# Altium PCB Daughter_Board_PCB_Layout.PcbDoc
Units mil, origin at the board's own origin, x right, y up, seen from the top; angles counter-clockwise.
Board outline 1665.35 x 1665.35 mil, 2 copper layers (Top Layer, Bottom Layer); 31 components, 37 nets, 148 pads, 38 vias.
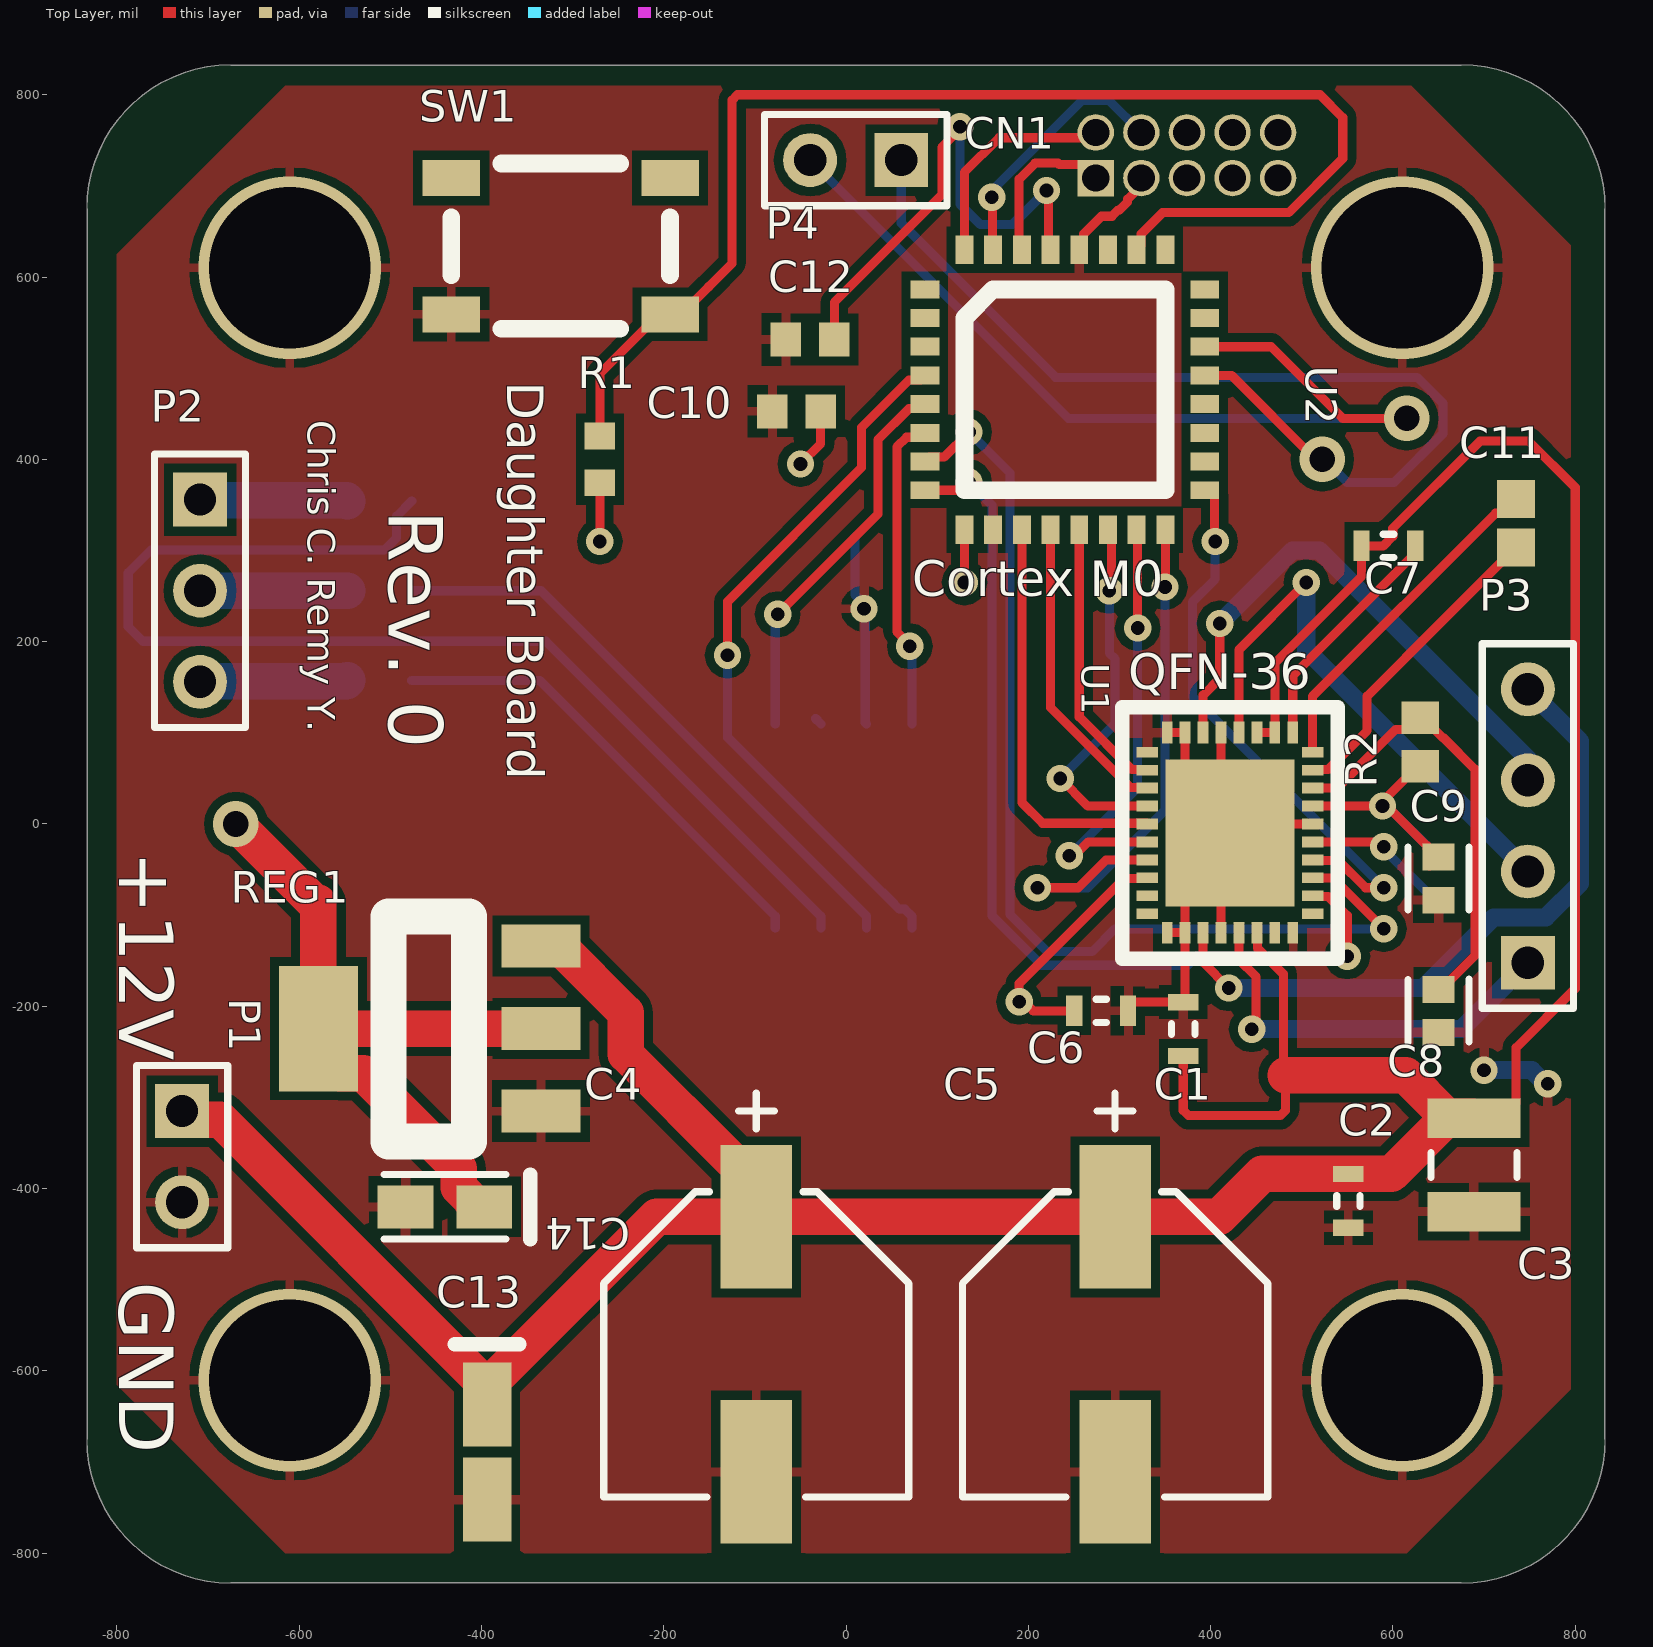
[diagram p0: Top Layer view]
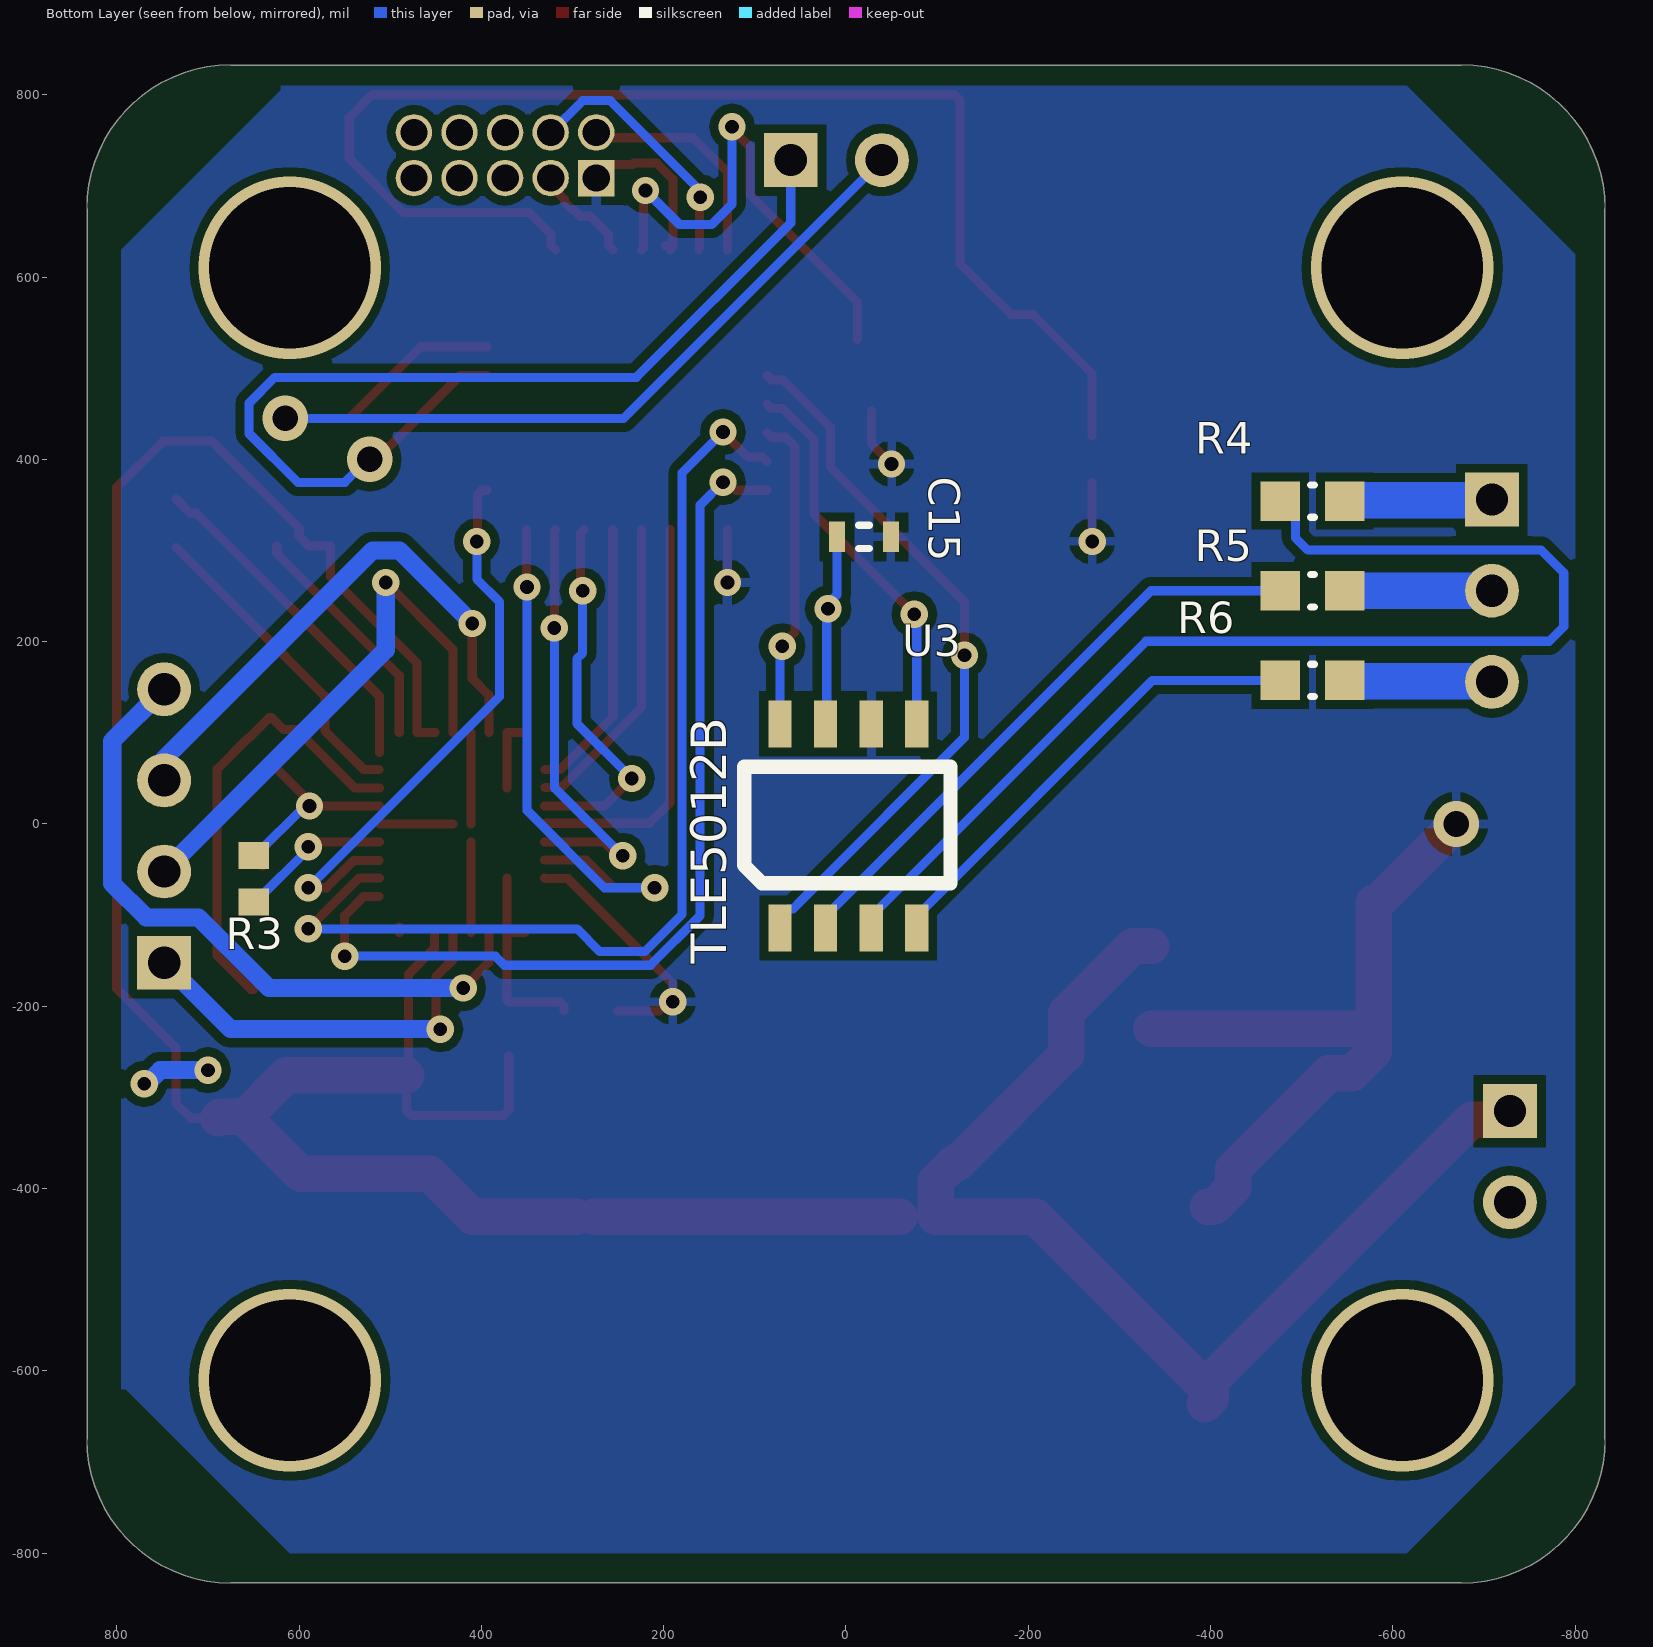
[diagram p1: Bottom Layer view, seen from below]

## Layer stack, top to bottom
Top Solder: solder mask 0.4, Solder Resist, Dk 3.5
Top Layer: signal copper 1.4
Dielectric 1: dielectric 12.6, FR-4, Dk 4.8
Bottom Layer: signal copper 1.4
Bottom Solder: solder mask 0.4, Solder Resist, Dk 3.5

## Board outline
-832.68,-675.2 -832.68,675.2 cw(c-675.2,675.2) -675.2,832.68 675.2,832.68 cw(c675.2,675.2) 832.68,675.2 832.68,-675.2 cw(c675.2,-675.2) 675.2,-832.68 -675.2,-832.68 cw(c-675.2,-675.2)

## Design rules (kind name [scope] priority, off if disabled: settings)
Clearance [All] p1: gap=10 ignorepadtopadclearanceinfootprint=FALSE except(0: Arc-Hole Track-Hole SMDPad-Hole THPad-Hole Via-Hole Fill-Hole Poly-Hole Region-Hole Text-Hole; 4.9: SMDPad-SMDPad; 5: Arc-Arc Arc-Track Track-Track; 8: Arc-SMDPad Track-SMDPad)
PolygonConnect [All] p1: connectstyle=Relief reliefconductorwidth=10 reliefentries=4 polygonreliefangle="90 Angle" airgapwidth=10
RoutingVias [All] p1: holewidth=28 width=50 viastyle="Through Hole" minholewidth=28 minwidth=50 maxholewidth=28 maxwidth=50
SilkToSilkClearance [All] p1: silktosilkclearance=0
SolderMaskExpansion [All] p1: expansion=4 istentingtop=FALSE
Width [All] p1: maxlimit=40 minlimit=10 preferedwidth=20 minimp=50.000000 maximp=50.000000 favimp=50.000000
29 further rules are at their usual default settings.

## Components (designator, comment, footprint, x,y, rotation, side; value= is the part's Value field where it differs from the comment)
C1 "CGA3E2X7R1H104K080AA" CAPC1608X90X20LL10 370,-225 r270 top
C2 "CGA3E2X7R1H104K080AA" CAPC1608X90X20LL10 551.18,-413.39 r90 top
C3 "C1210C476M4PACTU" CAPC3225X270X50LL20T25 688.98,-374.02 r90 top
C4 "EEE-FK1H101P" FP-EEE-FK1H101P-MFG -98.43,-570.87 r90 top value=100uF
C5 "EEE-FK1H101P" FP-EEE-FK1H101P-MFG 295.28,-570.87 r90 top value=100uF
C6 "CGA3E2X7R1H104K080AA" CAPC1608X90X20LL10 280,-205 r180 top
C7 "CGA3E2X7R1H104K080AA" CAPC1608X90X20LL10 595,305 r0 top
C8 "C0603C474K4RACTU" FP-C0603C-CF-MFG 650,-205 r90 top value="0.47 μF"
C9 "C0603C475K9PACTU" FP-C0603-CG-MFG 650,-60 r270 top value=4.7uF
C10 "GRM188R60J106ME47D" CAPC1608X90X35NL10T15 -54.37,452.76 r0 top
C11 "CC0603KRX7R9BB223" CAPC1608X90X40ML10T20 735,330 r270 top
C12 "GRM188R60J106ME47D" CAPC1608X90X35NL10T15 -39.37,531.5 r0 top
C13 "T491A106K010AT" KEMT-A-3216-18-2_M -393.7,-688.98 r270 top
C14 "TAJA226K010RNJ" AVX-TAJ-A-2_L -440,-420 r180 top
C15 "CGA3E2X7R1H104K080AA" CAPC1608X90X20LL10 -19.69,314.96 r180 bottom
CN1 "JTAG Connector" "Header 5x2 - 50mil" 274.02,708.66 r90 top
P1 "Header 2" HDR1X2 -728.35,-314.96 r270 top
P2 "Header 3" HDR1X3 -708.66,355.91 r270 top
P3 "Header 4" HDR1X4 748.03,-152.17 r90 top
P4 "Header 2" HDR1X2 60.63,728.35 r180 top
R1 "ERJ3EKF1002V" RESC1609X55X30LL15T15 -270,400 r90 top
R2 "CRCW06033R30JNEA" RESC1609X50X30ML10T20 630,90 r90 top
R3 "ERJ3EKF1002V" RESC1609X55X30LL15T15 650,-60 r90 bottom
R4 "470R 1% 0603(1608)" RESC0603(1608)_M -511.81,354.33 r180 bottom value="470.00 Ohm"
R5 "470R 1% 0603(1608)" RESC0603(1608)_M -511.81,255.91 r180 bottom value="470.00 Ohm"
R6 "470R 1% 0603(1608)" RESC0603(1608)_M -511.81,157.48 r180 bottom value="470.00 Ohm"
REG1 "Voltage Reg" SOT223 -334.65,-314.96 r90 top
SW1 "PTS525SM15SMTR2 LFS" "PTS525 SM08 SMTR2 LFS" -192.91,559.06 r180 top
U1 "TMC2130-LA" QFN-36 421.26,-9.84 r0 top
U2 "ATSAMD21E15B-AUT" TQFP-32 86.61,586.61 r0 top
U3 "TLE5012B" PG-DSO-8 72.44,-114.17 r180 bottom

## Footprints (in the part's own frame and the unit in brackets; to place one, negate y for a bottom-side part, rotate by r counter-clockwise, add the part's x,y. Pads: shape width x height; smd on the part's side, far side on the other; paste and mask are expansions set on the pad)
AVX-TAJ-A-2_L [mm] "Molded Capacitor, 2-Leads, Body 3.4x1.8mm, IPC High Density"
  rect 1.55x1.2 smd: 1(-1.1,0) 2(1.1,0)
  silkscreen extent -2.37,-0.9 1.7,0.9, body extent -1.92,-0.9 1.92,0.9, height 1.8
CAPC1608X90X20LL10 [mm] "Chip Capacitor, 2-Leads, Body 1.70x0.90mm, IPC High Density"
  rect 0.45x0.85 smd: 1(-0.75,0) 2(0.75,0)
  silkscreen extent -0.15,-0.33 0.15,0.33, body extent -0.85,-0.45 0.85,0.45, height 0.9
CAPC1608X90X35NL10T15 [mm] "Chip Capacitor, 2-Leads, Body 1.60x0.80mm, IPC Medium Density"
  rect 0.85x0.95 smd: 1(-0.675,0) 2(0.675,0)
  body extent -0.85,-0.45 0.85,0.45, height 0.9
CAPC1608X90X40ML10T20 [mm] "Chip Capacitor, 2-Leads, Body 1.7x0.9mm, IPC Low Density"
  rect 1.05x1.05 smd: 1(-0.675,0) 2(0.675,0)
  body extent -0.85,-0.45 0.85,0.45, height 0.9
CAPC3225X270X50LL20T25 [mm] "Chip Capacitor, 2-Leads, Body 3.20x2.50mm, IPC High Density"
  rect 1.1x2.6 smd: 1(-1.3,0) 2(1.3,0)
  silkscreen extent -0.35,-1.2 0.35,1.2, body extent -1.7,-1.35 1.7,1.35, height 2.7
FP-C0603-CG-MFG [mm]
  rect 0.75x0.9 smd paste+0 mask+0: 1(-0.6,0) 2(0.6,0)
  silkscreen extent -0.87,-0.85 0.87,0.85, body extent -1.2,-0.6 1.2,0.6, height 0.25
FP-C0603C-CF-MFG [mm]
  rect 0.75x0.9 smd paste+0 mask+0: 1(-0.6,0) 2(0.6,0)
  silkscreen extent -0.87,-0.85 0.88,0.85, body extent -1.2,-0.6 1.2,0.6, height 0.25
FP-EEE-FK1H101P-MFG [mm]
  rect 4x2 smd paste+0 mask+0: 1(-3.55,0) 2(3.55,0)
  silkscreen extent -4.25,-4.25 7,4.25, body extent -5.8,-4.5 5.8,4.5, height 0.25
HDR1X2 [mm] "Connector; Header; 2 Position"
  rect 1.5x1.5 hole 0.9: 1(0,0)
  round 1.5 hole 0.9: 2(2.54,0)
  silkscreen extent -1.27,-1.27 3.81,1.27
HDR1X3 [mm] "Connector; Header; 3 Position"
  rect 1.5x1.5 hole 0.9: 1(0,0)
  round 1.5 hole 0.9: 2(2.54,0) 3(5.08,0)
  silkscreen extent -1.27,-1.27 6.35,1.27
HDR1X4 [mm] "Connector; Header; 4 Position"
  rect 1.5x1.5 hole 0.9: 1(0,0)
  round 1.5 hole 0.9: 2(2.54,0) 3(5.08,0) 4(7.62,0)
  silkscreen extent -1.27,-1.27 8.89,1.27
"Header 5x2 - 50mil" [mil]
  rect 40x40 hole 30: 1(0,0)
  round 40 hole 30: 2(50,0) 3(0,-50) 4(50,-50) 5(0,-100) 6(50,-100) 7(0,-150) 8(50,-150) 9(0,-200) 10(50,-200)
KEMT-A-3216-18-2_M [mm] "Molded TAN Capacitor, 2-Leads, Body 3.4x1.8mm, IPC Low Density"
  rect 2.35x1.35 smd: 1(-1.325,0) 2(1.325,0)
  silkscreen extent -3,-0.9 -3,0.9, body extent -1.7,-0.9 1.7,0.9, height 1.8
PG-DSO-8 [mm]
  rect 0.65x1.31 smd: 1(0,0) 2(1.27,0) 3(2.54,0) 4(3.81,0) 5(3.81,5.69) 6(2.54,5.69) 7(1.27,5.69) 8(0,5.69)
  silkscreen extent -1,1.25 4.75,4.5
"PTS525 SM08 SMTR2 LFS" [mm]
  rect 1.6x1 smd: 1(0,0) 2(6.1,0) 3(0,-3.8) 4(6.1,-3.8)
  silkscreen extent 0,-4.2 6.1,0.4
QFN-36 [mm]
  rect 0.6x0.3 smd mask+0: 1(-2.3,2.25) 2(-2.3,1.75) 3(-2.3,1.25) 4(-2.3,0.75) 5(-2.3,0.25) 6(-2.3,-0.25) 7(-2.3,-0.75) 8(-2.3,-1.25) 9(-2.3,-1.75) 10(-2.3,-2.25) 19(2.3,-2.25) 20(2.3,-1.75) 21(2.3,-1.25) 22(2.3,-0.75) 23(2.3,-0.25) 24(2.3,0.25) 25(2.3,0.75) 26(2.3,1.25) 27(2.3,1.75) 28(2.3,2.25)
  rect 0.3x0.6 smd mask+0: 11(-1.75,-2.775) 12(-1.25,-2.775) 13(-0.75,-2.775) 14(-0.25,-2.775) 15(0.25,-2.775) 16(0.75,-2.775) 17(1.25,-2.775) 18(1.75,-2.775) 29(1.75,2.8) 30(1.25,2.8) 31(0.75,2.8) 32(0.25,2.8) 33(-0.25,2.8) 34(-0.75,2.8) 35(-1.25,2.8) 36(-1.75,2.8)
  rect 3.6x4.1 smd mask+0: -(0,0)
  silkscreen extent -3,-3.5 3,3.5
RESC0603(1608)_M [mm] "Chip Resistor, Body 1.6x0.8mm, IPC Low Density"
  rect 1.1x1.1 smd: 1(-0.9,0) 2(0.9,0)
  silkscreen extent -0.05,-0.45 0.05,0.45, body extent -0.85,-0.47 0.85,0.47, height 0.6
RESC1609X50X30ML10T20 [mm] "Chip Resistor, 2-Leads, Body 1.55x0.85mm, IPC Low Density"
  rect 0.9x1.05 smd: 1(-0.675,0) 2(0.675,0)
  body extent -0.82,-0.48 0.82,0.48, height 0.5
RESC1609X55X30LL15T15 [mm] "Chip Resistor, 2-Leads, Body 1.75x0.95mm, IPC High Density"
  rect 0.75x0.85 smd: 1(-0.65,0) 2(0.65,0)
  body extent -0.87,-0.48 0.87,0.48, height 0.55
SOT223 [mm]
  rect 1.2x2.2 smd: 1(0,0) 2(2.3,0) 3(4.6,0)
  rect 3.5x2.2 smd: 4(2.3,6.2)
  silkscreen extent -0.85,2 5.42,4.25
TQFP-32 [mm]
  rect 0.8x0.5 smd mask+0: 1(0,0) 2(0,-0.8) 3(0,-1.6) 4(0,-2.4) 5(0,-3.2) 6(0,-4) 7(0,-4.8) 8(0,-5.6) 17(7.8,-5.6) 18(7.8,-4.8) 19(7.8,-4) 20(7.8,-3.2) 21(7.8,-2.4) 22(7.8,-1.6) 23(7.8,-0.8) 24(7.8,0)
  rect 0.5x0.8 smd mask+0: 9(1.1,-6.7) 10(1.9,-6.7) 11(2.7,-6.7) 12(3.5,-6.7) 13(4.3,-6.7) 14(5.1,-6.7) 15(5.9,-6.7) 16(6.7,-6.7) 25(6.7,1.1) 26(5.9,1.1) 27(5.1,1.1) 28(4.3,1.1) 29(3.5,1.1) 30(2.7,1.1) 31(1.9,1.1) 32(1.1,1.1)
  silkscreen extent 1.1,-5.6 6.7,0

## Part data
C1 C2 C6 C7 C15: library part CMP-2000-07546-1, "Chip Capacitor, 0.1 uF, +/- 10%, 50 V, -55 to 125 degC, 0603 (1608 Metric), RoHS, Tape and Reel", Capacitance=100nF, Case Code (Imperial)=0603, Case Code (Metric)=1608, Dielectric=X7R, Manufacturer=TDK, Max Operating Temperature=125degC, Min Operating Temperature=-55degC, Package Description="2-Pin Surface Mount Device, Body 1.6 x 0.8 mm", Package Quantity=1, Package Reference=603, Tolerance=10%, Voltage=50V, Case/Package=0603, Composition=Ceramic, Datasheet URL=https://product.tdk.com/info/en/catalog/datasheets/mlcc_automotive_general_en.pdf, Datasheet Version=12/2014, Depth=0.8mm, Height=0.8mm, Lead Free=LeadFree, Length=1.6mm, Manufacturer URL=http://www.tdk.com/, Mount=SurfaceMount, Mounting Technology=SurfaceMount, Packaging=TapeandReel, Radiation Hardening=No, REACH SVHC=NoSVHC, RoHSCompliant=True, Termination=SMD/SMT, Thickness=0.035inch, Voltage Rating=50V, Voltage Rating (DC)=50V, Weight=7.1E-05oz, Width=0.8mm
C3: library part CMP-2000-06020-1, "Chip Capacitor, 47 uF, +/- 20%, 16 V, -55 to 85 degC, 1210 (3225 Metric), RoHS, Tape and Reel", Capacitance=47µF, Manufacturer=Kemet, Operating Temperature=-55°C~85°C, Package / Case=1210(3225Metric), Package Description="2-Pin Surface Mount Device, Body 3.2 x 2.5 mm", Package Reference=1210, Ratings=-, Standard Package=1, Temperature Coefficient=X5R, Tolerance=±20%, Voltage - Rated=16V, Applications=GeneralPurpose, Catalog Drawings=ACTU_1210, Category=Capacitors, Datasheet URL=http://www.datasheets360.com/pdf/-8690541728068054270, Datasheet Version=05/2013, Family=CeramicCapacitors, Features=-, Height - Seated (Max)=-, Lead Spacing=-, Lead Style=-, Manufacturer URL=http://www.kemet.com/, Mounting Technology=SurfaceMount, Mounting Type=SurfaceMount,MLCC, Online Catalog=X5RDielectric(CommercialGrade), Other Names=399-5514-6, Packaging=Digi-Reel®, Product Training Modules=CapacitorBasics-TypicalUsesforCapacitors, Series=C, Size / Dimension="0.126\"Lx0.098\"W(3.20mmx2.50mm)", Thickness (Max)="0.110\"(2.80mm)"
C4 C5: library part CMP-05427-000005-1, "CAP ALUM 100UF 20% 50V SMD", Capacitance=100uF, Leakage Current=50uA, Manufacturer="Panasonic Electronic Components", Package=0, Ripple Current=350mA, Temperature="-55°C to +105°C", Temperature Range High=+105°C, Temperature Range Low=-55°C, Tolerance=20%, Voltage Rating=50V, Automotive=Yes, Automotive Grade="Grade 2", Category=Cap, ComponentLink2Description=Datasheet, ComponentLink2URL=https://industrial.panasonic.com/cdbs/www-data/pdf/RDE0000/ABA0000C1181.pdf, Device Class L1="Passive Components", Device Class L2=Capacitors, Device Class L3="Aluminum Electrolytic Capacitors", Digikey Description="CAP ALUM 100UF 20% 50V SMD", Dissipation Factor=10%, Esr=0.34Ω, Height=10.5mm, Lead Free=Yes, Life=2000Hours, Manufacturer Part Number=EEE-FK1H101P, Material=Aluminum, Mouser Description="Cap Aluminum Lytic 100uF 50V 20% (8 X 10.2mm) SMD 350mA 2000h 105C Automotive T/R", Octopart=https://octopart.com/eeefk1h101p-panasonic-4642841, RoHS=TRUE
C8: library part CMP-03020-024061-1, "CAP CER 0.47UF 16V X7R 0603", Capacitance="0.47 μF", Manufacturer=KEMET, Package=C0603C-CF, Temperature="-55°C to +125°C", Temperature Characteristic=X7R, Temperature Coefficient=30ppm/°C, Temperature Range High=+125°C, Temperature Range Low=-55°C, Tolerance=0.1, Voltage Rating="16 V", Automotive=Yes, Automotive Grade="Grade 1", Category=Cap, ComponentLink2Description=Datasheet, ComponentLink2URL=https://api.kemet.com/component-edge/download/datasheet/C0603C100J5GACAUTO.pdf, Device Class L1="Passive Components", Device Class L2=Capacitors, Device Class L3="Ceramic Capacitors", Digikey Description="CAP CER 0.47UF 16V X7R 0603", Height=0.87mm, Lead Free=Yes, Manufacturer Part Number=C0603C474K4RACTU, Material=Ceramic, Mouser Description="0603 C 470nF Ceramic Multilayer Capacitor, 16 V, +125degC, X7R Dielec, +/-10%", Octopart=https://octopart.com/c0603c474k4ractu-kemet-109683, RoHS=TRUE
C9: library part CMP-03020-024641-1, "CAP CER 4.7UF 6.3V X5R 0603", Capacitance=4.7uF, Manufacturer=Kemet, Package=C0603-CG, Temperature="-55°C to +85°C", Temperature Characteristic=X5R, Temperature Coefficient=15%, Temperature Range High=+85°C, Temperature Range Low=-55°C, Tolerance=10%, Voltage Rating=6.3V, Automotive=No, Category=Cap, ComponentLink2Description=Datasheet, ComponentLink2URL=https://content.kemet.com/datasheets/KEM_C1006_X5R_SMD.pdf, Device Class L1="Passive Components", Device Class L2=Capacitors, Device Class L3="Ceramic Capacitors", Digikey Description="CAP CER 4.7UF 6.3V X5R 0603", Height=0.9mm, Ipc Land Pattern Name=CAPC16080X80, Lead Free=Yes, Manufacturer Part Number=C0603C475K9PACTU, Material=Ceramic, Mouser Description="Multilayer Ceramic Capacitors MLCC - SMD/SMT 6.3volts 4.7uF X5R 10%", Octopart=https://octopart.com/c0603c475k9pactu-kemet-104242, RoHS=TRUE
C10 C12: library part CMP-2006-02792-1, Manufacturer=Murata, Part Number=GRM188R60J106ME47D
C11: library part CMP-2100-03602-1, "Chip Capacitor, 22 nF, +/- 10%, 50 V, -55 to 125 degC, 0603 (1608 Metric), RoHS, Tape and Reel", Capacitance=22nF, Case Code (Imperial)=0603, Case Code (Metric)=1608, Dielectric=X7R, Dielectric Material=Ceramic, Insulation Resistance=100GR, Manufacturer=Yageo, Max Operating Temperature=125degC, Min Operating Temperature=-55degC, Package Description="2-Pin Surface Mount Device, Body 1.6 x 0.8 mm", Package Quantity=1, Tolerance=10%, Voltage Rating=50V, Case/Package=0603, Composition=Ceramic, Datasheet URL=http://www.yageo.com/documents/recent/UPY-GPHC_X7R_6.3V-to-50V_15.pdf, Datasheet Version="Rev. 15, 10/2016", Depth=0.8mm, Height=0.8mm, Lead Free=LeadFree, Length=1.6mm, Manufacturer URL=http://www.yageo.com/, Mount=SurfaceMount, Number of Pins=2, Package Reference=0603, Packaging=TapeandReel, Radiation Hardening=No, REACH SVHC=NoSVHC, RoHSCompliant=True, Termination=SMD/SMT, Thickness=0.035inch, Voltage Rating (DC)=50V, Width=0.031inch
C13: library part CMP-2000-05172-1, "Capacitor, Tantalum, 10 uF, +/- 10%, 10 V, -55 to 125 degC, 2-Pin SMD (1206), RoHS, Tape and Reel", Capacitance=10µF, ESR (Equivalent Series Resistance)=3.8Ohm, Lifetime @ Temp.=2000Hrs@85degC, Manufacturer=Kemet, Manufacturer Size Code=A, Operating Temperature=-55degC~125degC, Package / Case=1206(3216Metric), Package Description="2-Pin Surface Mount Device, Body 3.2 x 1.6 mm", Package Reference=1206, Standard Package=2,000, Tolerance=±10%, Voltage - Rated=10V, Catalog Drawings=T49x,T5xxSeries_A-side1T49x,T5xxSeries_A,B-side2T49x,T5xxSeries_A,SBottom, Category=Capacitors, Datasheet URL=http://www.farnell.com/datasheets/1824869.pdf, Datasheet Version=Apr-14, Family=TantalumCapacitors, Features=GeneralPurpose, Height - Seated (Max)="0.071\"(1.80mm)", Lead Spacing=-, Manufacturer URL=http://www.kemet.com/, Mounting Type=SurfaceMount, Online Catalog=T491Series, Other Names=399-3684-2, Packaging=Tape&Reel(TR), Product Training Modules=CapacitorBasics-TypicalUsesforCapacitorsDeratingGuidelinesforSurfaceMountTantalumCapacitors, Series=T491, Size / Dimension="0.126\"Lx0.063\"W(3.20mmx1.60mm)", Type=Molded
C14: library part CMP-2000-07524-1, "Chip Capacitor, 22 uF, +/- 10%, 10 V, -55 to 125 degC, 1206 (3216 Metric), RoHS, Tape and Reel", Capacitance=22uF, Case Code (Imperial)=1206, Case Code (Metric)=3216, Dielectric Material=Tantalum, ESR (Equivalent Series Resistance)=3Ohm, Leakage Current=2.2uA, Manufacturer=AVX, Max Operating Temperature=125degC, Min Operating Temperature=-55degC, Package Description="2-Pin Surface Mount Device, Body 3.2 x 1.65 mm", Package Quantity=1, Package Reference=TAJ-A-2, Tolerance=10%, Voltage=10V, Case/Package=1206, Datasheet URL=http://datasheets.avx.com/TAJ.pdf, Datasheet Version=09/2017, Depth=1.6mm, Dissipation Factor=8%, Height=1.6mm, Height - Seated (Max)=0.071inch, Lead Free=LeadFree, Lead Pitch=1.1mm, Length=3.2mm, Manufacturer URL=http://www.avx.com/, Mount=PCB, Mounting Technology=SurfaceMount, Number of Pins=2, Packaging=TapeandReel, Polarity=Polar, Radiation Hardening=No, REACH SVHC=NoSVHC, RoHSCompliant=True, Termination=SMD/SMT, Voltage Rating=10V, Voltage Rating (DC)=10V, Width=1.6mm
P1 P4: "Header, 2-Pin", LatestRevisionDate=17-Jul-2002, LatestRevisionNote="Re-released for DXP Platform.", Publisher="Altium Limited"
P2: "Header, 3-Pin", LatestRevisionDate=17-Jul-2002, LatestRevisionNote="Re-released for DXP Platform.", Publisher="Altium Limited"
P3: "Header, 4-Pin", LatestRevisionDate=17-Jul-2002, LatestRevisionNote="Re-released for DXP Platform.", Publisher="Altium Limited"
R1 R3: library part CMP-2000-07452-1, "Chip Resistor, 10 KOhm, +/- 1%, 0.1 W, -55 to 155 degC, 0603 (1608 Metric), RoHS, Tape and Reel", Case Code (Imperial)=0603, Case Code (Metric)=1608, Manufacturer=Panasonic, Max Operating Temperature=155degC, Max Power Dissipation=100mW, Min Operating Temperature=-55degC, Package Description="2-Pin Surface Mount Device, Body 1.6 x 0.85 mm", Package Quantity=1, Package Reference=603, Resistance=10KOhm, Temperature Coefficient=100ppm\/degreesC, Tolerance=1%, Voltage Rating=75V, Case\/Package=0603, Composition=ThickFilm, Contact Plating=Tin, Datasheet URL=https://industrial.panasonic.com/cdbs/www-data/pdf/RDA0000/AOA0000C304.pdf, Datasheet Version=02/2017, Depth=0.8mm, Height=0.45mm, Lead Free=LeadFree, Length=1.6mm, Manufacturer URL=http://www.panasonic.com/, Military Standard=Not, Mount=SurfaceMount, Mounting Technology=SurfaceMount, Number of Pins=2, Number of Terminations=2, Packaging=TapeandReel, Power Rating=100mW, Radiation Hardening=No, REACH SVHC=NoSVHC, RoHSCompliant=true, Termination=SMD/SMT, Voltage Rating (DC)=75V, Width=0.031inch
R2: library part CMP-2000-03328-1, Manufacturer="Vishay Dale", Part Number=CRCW06033R30JNEA
R4 R5 R6: library part CMP-1012-00473-1, "470R 0.1W 1% 0603 (1608 Metric)  SMD", Case-EIA=0603, Case-Metric=1608, Power="0.1 W", Tolerance="1 %", Technology=SMT
SW1: library part "Tactile Push Button", "SWITCH TACTILE SPST-NO 0.02A 15V"
U1: "TMC2130-LA Trinamic Driver QFN-36"
U2: "IC MCU 32BIT 32KB FLASH 32TQFP"
U3: "TLE5012B GMR-Based Angle Sensor PG-DSO-8"

## Via types
v1: diameter 30, hole 15, Top Layer to Bottom Layer, 31 vias
v2: diameter 200, hole 177.17, Top Layer to Bottom Layer, 4 vias
v3: diameter 50, hole 28, Top Layer to Bottom Layer, 3 vias

## Nets (pads, with @x,y where several pads share a name; then routed paths per layer and width w, separated by ;. In a path a pad name is that pad's centre, name@x,y a point inside that pad or via, vN(x,y) a via of type N, cw(c..) or ccw(c..) an arc to the next point about the centre after c; other vN are vias at no path point)
5VOUT: C9.1 R2.1 R3.2 U1.25 | length 325.5
  Top Layer w10: U1.25 v1@583.31,19.68 ; R2.1 627.05,63.43 v1@583.31,19.68 ; C9.1@640.24,-46.14 C9.1 647.05,-36.38 637.28,-26.61 637.28,-23.66 593.94,19.68 v1(588.62,19.68) v1@583.31,19.68
  Bottom Layer w10: v1(588.62,19.68) 593.94,19.68 648.03,-34.41 R3.2
+3.3V: C6.2 C10.2 C14.1 C15.2 CN1.1 R1.1 REG1.2 REG1.4 U1.8 U2.9 U2.30 U3.6 | length 1453.2
  Top Layer w10: v1(-270,310) R1.1 ; v1(-50,395) -27.8,417.2 C10.2 ; U2.9 U2.9 129.96,265.04 v1(130,265) ; U2.30@197.76,634.76 U2.30 190,632.83 190,707.43 207.57,725 232.63,725 233.96,723.66 259.02,723.66 CN1.1 ; C6.2@250.24,-204.76 C6.2 205.41,-205 195.41,-195 v1(190,-195) 190,-174.98 305.14,-59.83 329.93,-59.83 U1.8
  Top Layer w40: v3(-669.29,0) -582.68,-86.61 -578.74,-86.61 REG1.4 ; C14.1 -403.58,-420 -424.8,-398.79 -424.8,-378.35 -529.84,-273.31 -555.43,-273.31 -578.74,-250 REG1.4 ; REG1.2 REG1.4
  Bottom Layer w10: U3.6@-33.46,115.75 U3.6
CSN: U1.2 U2.13 | length 303.3
  Top Layer w10: U2.13 255.91,117.44 313.51,59.83 U1.2@329.93,59.83
CSQ_ENC: P2.1 R4.2 | length 162.1
  Bottom Layer w40: P2.1 -707.87,355.12 -548.03,355.12 R4.2
DATA_ENC: P2.3 R6.2 | length 162.1
  Bottom Layer w40: P2.3 -707.87,156.69 -548.03,156.69 R6.2
DIAG0: U1.21 U2.7 | length 1148.2
  Top Layer w10: U2.7 91.46,402.48 107.48,402.48 v1(135,430) ; U1.21 534.06,-59.06 v1(590,-115)
  Bottom Layer w10: v1(135,430) 179.84,385.16 179.84,-98.98 220.86,-140 270,-140 295,-115 v1(590,-115)
DIAG1: U1.20 U2.8 | length 1045.1
  Top Layer w10: U2.8 120.73,366.14 129.59,375 v1(135,375) ; U1.20@512.59,-79.52 529.01,-79.52 550,-100.51 v1(550,-145)
  Bottom Layer w10: v1(135,375) 160,350 160,-100.36 214.64,-155 374.62,-155 384.62,-145 v1(550,-145)
DIR: U1.7 U2.16 | length 616.6
  Top Layer w10: v1(210,-70) 254.73,-70 285.36,-39.37 U1.7 ; v1(350,260) 350.39,260.39 U2.16
  Bottom Layer w10: v1(210,-70) 265,-70 350,15 v1(350,260)
DRV_ENN_CFG6: U1.22 U2.17 | length 631.6
  Top Layer w10: U2.17 399.61,366.14 404.45,361.3 404.45,310.55 v1(405,310) ; U1.22@512.44,-40 540,-40 570,-70 v1(590,-70)
  Bottom Layer w10: v1(405,310) 405,268.58 380,243.58 380,140 v1(590,-70)
GND: C1.1 C2.1 C3.1 C4.1 C5.1 C6.1 C8.1 C9.2 C10.1 C12.1 C13.2 C14.2 C15.1 CN1.3 P1.2 REG1.1 SW1.2 U1.1 U1.11 U1.12 U1.14 U1.18 U1.24 U1.33 U1.35 U1.36 U1.- U2.10 U2.28 U3.7 | length 998.7
  Top Layer w10: U2.28 260.75,634.76 260.75,647.24 280.26,666.75 291.75,666.75 298.66,673.66 300.23,673.66 309.02,682.45 309.02,685.54 324.02,700.54 CN1.3 ; C6.1 309.53,-199.33 313.39,-195.47 C1.1 372.05,-193.43 U1.12 ; U1.11 U1.12 ; U1.36 U1.35 U1.-@372.05,39.37 ; U1.-@372.05,-59.06 U1.12 ; U1.14 U1.-@411.42,-19.69 ; U1.-@411.42,0 U1.33 ; U1.-@431.1,0 U1.24 ; U1.18 U1.18@490.16,-112.82
  Bottom Layer w10: C15.1 9.84,251.47 19.68,241.63 v1(19.68,236.22) 21.06,234.84 21.06,111.22 U3.7
  Bottom Layer w20: CN1.3@324.02,703.25 CN1.3 ; v1(700,-270) 752.29,-270 767.29,-285 v1(770,-285)
  other v2: -610.24,-610.24 610.24,-610.24 -610.24,610.24 610.24,610.24
IFA: U2.5 U3.5 | length 426.1
  Top Layer w10: v1(-75,230) 35,340 35,421.5 69.29,455.79 81.77,455.79 U2.5
  Bottom Layer w10: U3.5 -77.56,227.44 v1(-75,230)
IFB: U2.6 U3.8 | length 347.9
  Top Layer w10: v1(70,195) 70,196.72 55.87,210.86 55.87,413.69 66.46,424.29 81.77,424.29 U2.6
  Bottom Layer w10: v1(70,195) 72.44,192.56 U3.8
IFC: U2.4 U3.1 | length 791
  Top Layer w10: v1(-130,185) -130,244.02 16.94,390.95 16.94,434.93 69.29,487.28 81.77,487.28 U2.4
  Bottom Layer w10: v1(-130,185) -130,95 40.39,-75.39 40.62,-75.39 48.24,-83 48.24,-83.24 58.39,-93.39 64.65,-93.39 72.44,-101.18 U3.1
M1A1: P3.3 U1.34 | length 616.6
  Top Layer w10: U1.34 391.73,141.32 410,159.59 v1(410,220)
  Bottom Layer w20: v1(410,220) 490,300 519.5,300 748.03,71.47 P3.3
M1A2: P3.2 U1.32 | length 613
  Top Layer w10: U1.32 431.1,191.1 v1(505,265)
  Bottom Layer w20: v1(505,265) 505,190.87 P3.2
M1B1: P3.4 U1.13 | length 741.8
  Top Layer w10: U1.13 391.73,-151.73 v1(420,-180)
  Bottom Layer w20: v1(420,-180) 632.86,-180 710.22,-102.64 767.6,-102.64 805,-65.24 805,90.87 P3.4
M1B2: P3.1 U1.15 | length 449
  Top Layer w10: U1.15 431.1,-148.68 450,-167.57 450,-214.59 445,-219.59 v1(445,-225)
  Bottom Layer w20: v1(445,-225) 675.2,-225 P3.1
MISO: U1.5 U2.11 | length 445.7
  Top Layer w10: U2.11 192.91,23.62 215.76,0.78 U1.5@329.93,0.78
MOSI: U1.4 U2.14 | length 411.4
  Top Layer w10: v1(235,50) 265.31,19.68 U1.4 ; U2.14 291.45,318.79 291.45,259.73 288.9,257.18 v1(288.9,255.91)
  Bottom Layer w10: v1(235,50) 295.28,110.28 295.28,181.11 288.9,187.49 v1(288.9,255.91)
NetC7_2: C7.2 U1.29 | length 260.3
  Top Layer w10: U1.29 490.16,162.76 624.53,297.13 C7.2
NetC8_2: C8.2 R2.2 U1.26 | length 493.4
  Top Layer w10: U1.26 538.62,39.37 603.11,103.86 617.28,103.86 R2.2 632.95,116.57 655.39,94.14 656.05,94.14 690,60.2 690,-144.33 652.95,-181.38 C8.2
NetC11_1: C11.1 U1.28 | length 374.1
  Top Layer w10: U1.28 511.81,139.96 712.76,340.91 719.33,340.91 C11.1
NetC11_2: C11.2 U1.27 | length 345.3
  Top Layer w10: U1.27@512.59,59.83 529.01,59.83 571.67,102.5 571.67,140.09 655,223.43 C11.2
NetC12_2: C12.2 U2.29 | length 562.1
  Top Layer w10: C12.2 -12.8,572.2 105.16,690.16 105.16,742.42 125,762.26 v1(125,765) ; v1(220,695) 222.2,692.8 222.2,632.13 U2.29
  Bottom Layer w10: v1(125,765) 125,680.15 147.49,657.65 182.65,657.65 v1(220,695)
NetR3_1: R3.1 U1.23 | length 167
  Top Layer w10: U1.23 579.27,-19.69 584.59,-25 v1(590,-25)
  Bottom Layer w10: v1(590,-25) 590,-27.56 648.03,-85.59 R3.1
NetR4_1: R4.1 U3.3 | length 1321
  Bottom Layer w10: R4.1 -493.03,337.68 -493.03,314.06 -506.65,300.43 -762.56,300.43 -787.4,275.59 -787.4,216.54 -771.3,200.43 -329.17,200.43 -27.56,-101.18 U3.3
NetR5_1: R5.1 U3.2 | length 659.7
  Bottom Layer w10: R5.1 -334.65,255.91 22.44,-101.18 U3.2
NetR6_1: R6.1 U3.4 | length 519
  Bottom Layer w10: R6.1 -336.22,157.48 -77.56,-101.18 U3.4
RESET: R1.2 SW1.1 U2.26 | length 1445.1
  Top Layer w10: R1.2 -270,493.78 -204.72,559.06 SW1.1 -181.1,559.06 -150.79,589.37 -150.63,589.37 -125,615 -125,794.14 -119.14,800 520,800 545,775 545,730.15 485.56,670.7 347.2,670.7 323.74,647.24 323.74,634.76 U2.26
SCK: U1.3 U2.12 | length 336.9
  Top Layer w10: U2.12 224.41,127.73 311.98,40.15 U1.3@329.93,40.15
SCK_ENC: P2.2 R5.2 | length 161.4
  Bottom Layer w40: P2.2 R5.2
SCL: P4.2 U2.22 | length 1025.6
  Top Layer w10: U2.22 466.38,523.62 545,445 v3(615,445)
  Bottom Layer w10: P4.2 243.98,445 v3(615,445)
SDA: P4.1 U2.21 | length 1110.6
  Top Layer w10: U2.21 422.87,492.13 515,400 v3(522.5,400)
  Bottom Layer w10: P4.1 60.63,659.37 230,490 626.57,490 655,461.57 655,428.43 601.29,374.72 549.72,374.72 524.45,400 v3(522.5,400)
STEP: U1.6 U2.15 | length 481.4
  Top Layer w10: v1(245,-35) 250.41,-35 265.73,-19.69 U1.6 ; U2.15 320,321.73 v1(320,215)
  Bottom Layer w10: v1(245,-35) 320,40 v1(320,215)
SW_CLK: CN1.4 U2.31 | length 285.1
  Top Layer w10: v1(159.92,687.65) 160.67,686.9 160.67,630.67 U2.31
  Bottom Layer w10: v1(159.92,687.65) 159.92,694.92 258.66,793.66 289.02,793.66 CN1.4
SW_DIO: CN1.2 U2.32 | length 247.2
  Top Layer w10: U2.32 129.92,714.92 167.92,752.92 268.28,752.92 CN1.2
VM: C1.2 C2.2 C3.2 C4.2 C5.2 C7.1 C13.1 P1.1 REG1.3 U1.16 U1.30 U1.31 | length 3943.8
  Top Layer w10: C1.2 370,-314.14 375.86,-320 476.43,-320 482.28,-314.14 482.28,-275.59 480,-273.31 480,-164.72 451.57,-136.29 451.57,-119.87 U1.16 ; U1.31 U1.30 470.47,176.47 565.47,271.47 C7.1 589.33,305 599.81,315.48 599.81,324.26 695.55,420 749.14,420 800,369.14 800,-180.47 735.16,-245.31 735.16,-306.18 718.5,-322.83 C3.2
  Top Layer w40: P1.1 -718.82,-324.49 -686.34,-324.49 -400.28,-610.55 -400.28,-630.24 C13.1 ; C13.1@-393.7,-617.13 -207.68,-431.1 C4.2 -98.43,-391.73 -117.8,-372.36 -121.84,-372.36 -241.61,-252.58 -241.61,-207.2 -314.96,-133.86 REG1.3 ; -59.06,-431.1 C5.2@275.59,-431.1 ; C5.2 409.29,-431.1 456.54,-383.86 C2.2 598.43,-383.86 C3.2@659.45,-322.83 ; 482.28,-275.59 613.86,-275.59 657.8,-319.53 657.8,-321.18 687.32,-321.18 C3.2
pads on no net: CN1.5 CN1.6 CN1.7 CN1.8 CN1.9 CN1.10 SW1.3 SW1.4 U1.9 U1.10 U1.17 U1.19 U2.1 U2.2 U2.3 U2.18 U2.19 U2.20 U2.23 U2.24 U2.25 U2.27

## Polygon pours and split planes (outlines as drawn)
+3.3V on Bottom Layer "+3.3V_L02_P001" (solid, remove dead copper, pour order 1): -615,810 -800,625 -800,-615 -615,-800 610,-800 790,-620 795,-620 795,630 620,805 620,810
GND on Top Layer "GND_L01_P000" (solid, remove dead copper, pour order 0): -615,810 -800,625 -800,-615 -615,-800 615,-800 795,-620 795,635 620,810

## Silkscreen, mask and mechanical layers (free items; w line width, h text height)
Top Overlay:
  text "Daughter Board" at -371.67,485 h40 r270
  text "Chris C. Remy Y." at -590.24,442.76 h30 r270
  text "Rev. 0" at -501.81,344.33 h60 r270
  text "+12V" at -797.09,-29.69 h60 r270
  text "GND" at -797.09,-502.13 h60 r270
Mechanical 1:
  lines w47.24: -856.3,-675.2 ccw(c-675.2,-675.2) -675.2,-856.3 675.2,-856.3 ccw(c675.2,-675.2) 856.3,-675.2 856.3,675.2 ccw(c675.2,675.2) 675.2,856.3 -675.2,856.3 ccw(c-675.2,675.2) -856.3,675.2 -856.3,-675.2

## Text inside footprints (layer, text, board x,y; h text height)
U1: Top Overlay "QFN-36" at 309.75,147.64 h39.37
U2: Top Overlay "Cortex M0" at 72.83,250 h39.37